# Altium PCB Chong's Cool STM32 Board.PcbDoc
Units mm, origin at the board's own origin, x right, y up, seen from the top; angles counter-clockwise.
Board outline 48 x 48 mm, 2 copper layers (Top Layer, Bottom Layer), stack 1.535 mm thick; 57 components, 45 nets, 235 pads, 166 vias.
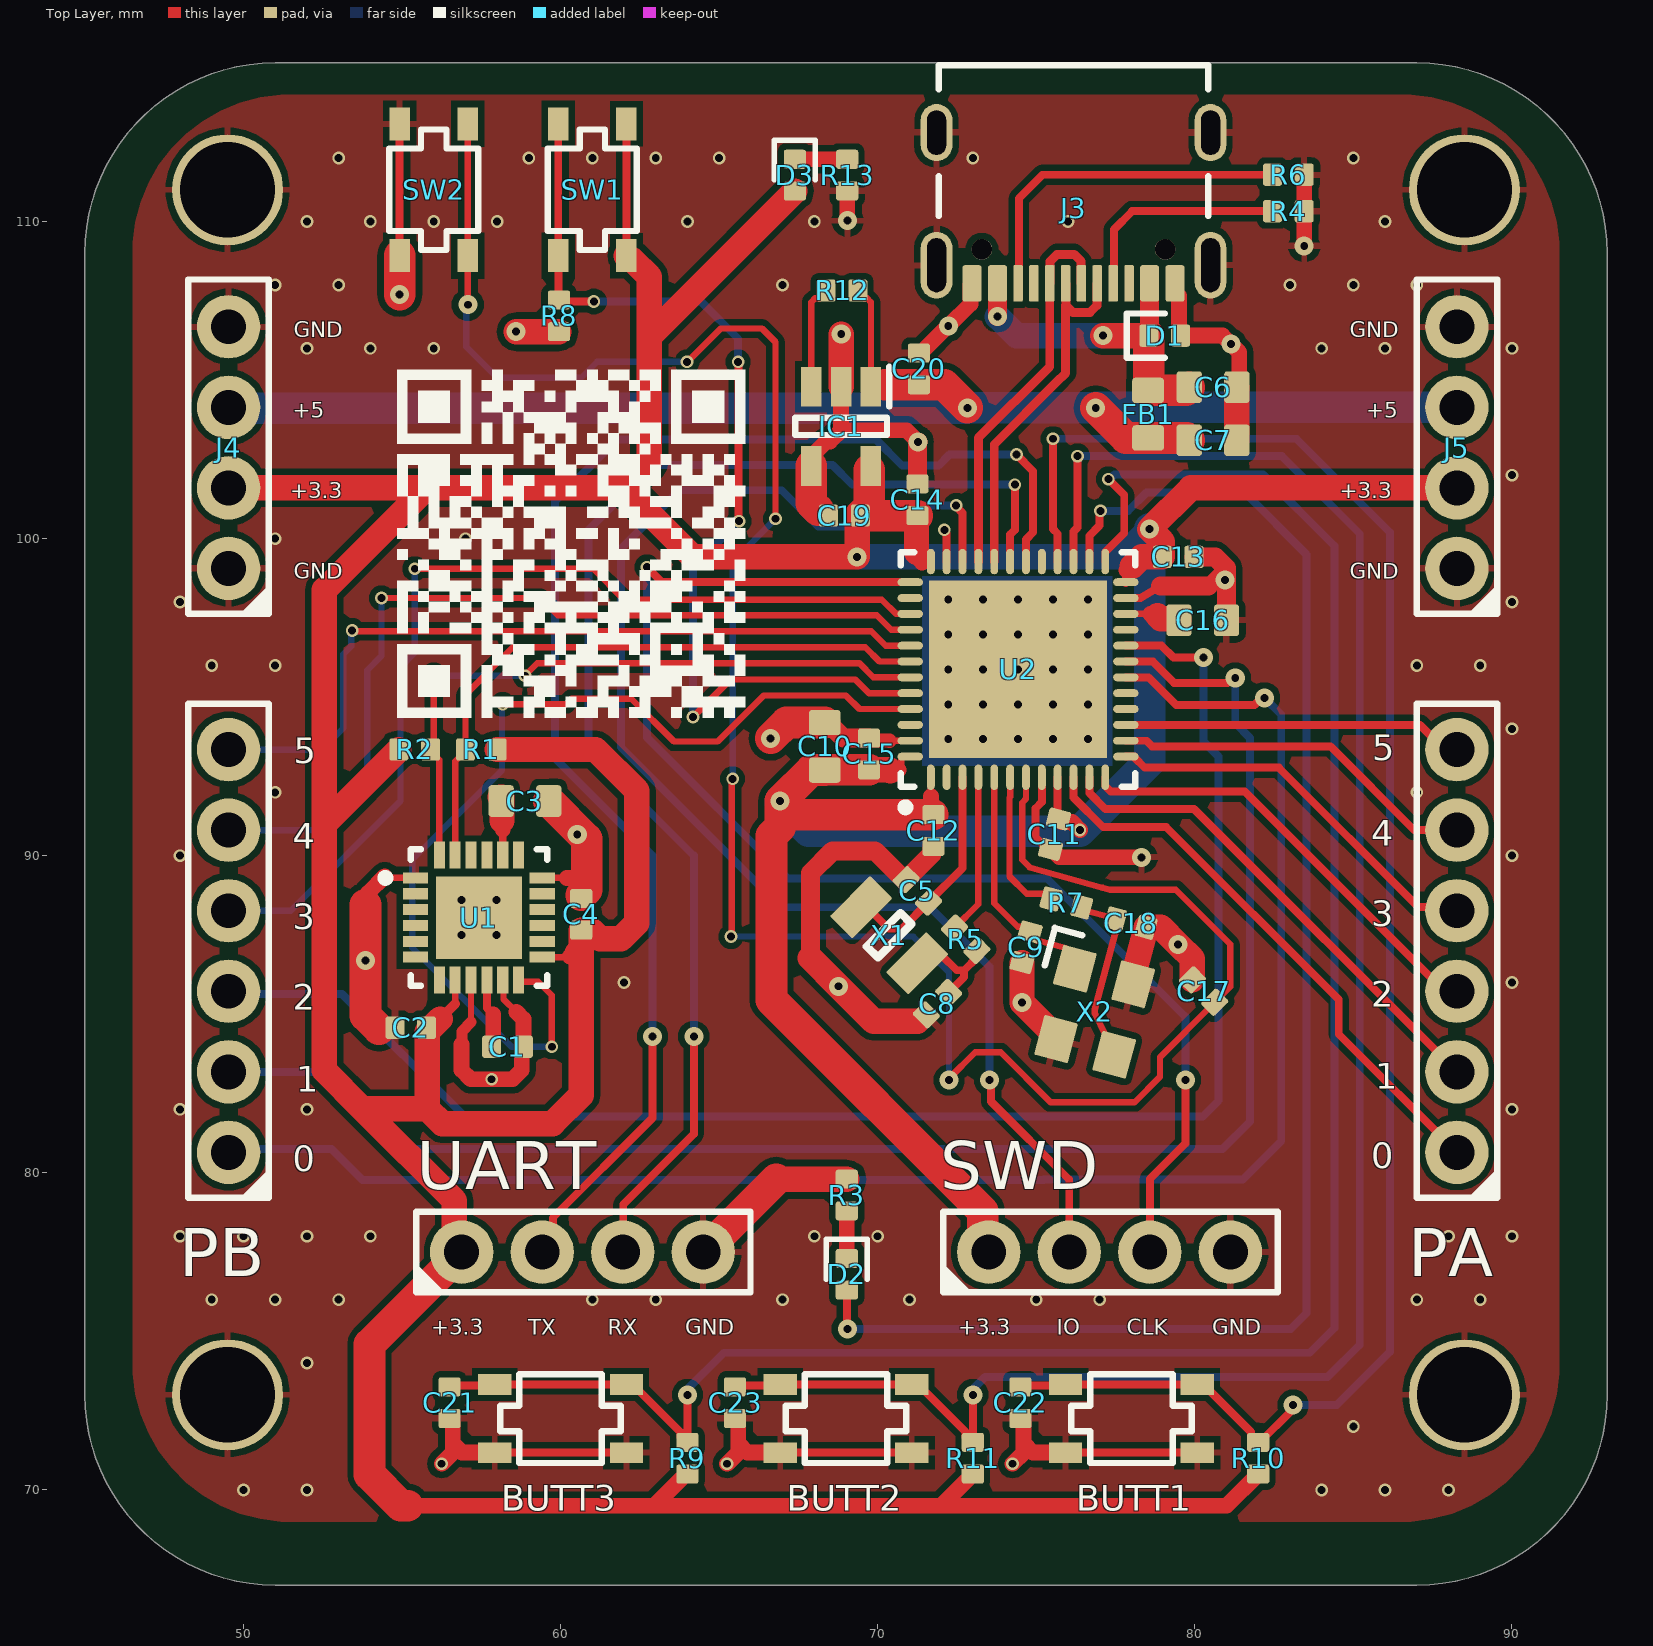
[diagram p0: Top Layer view]
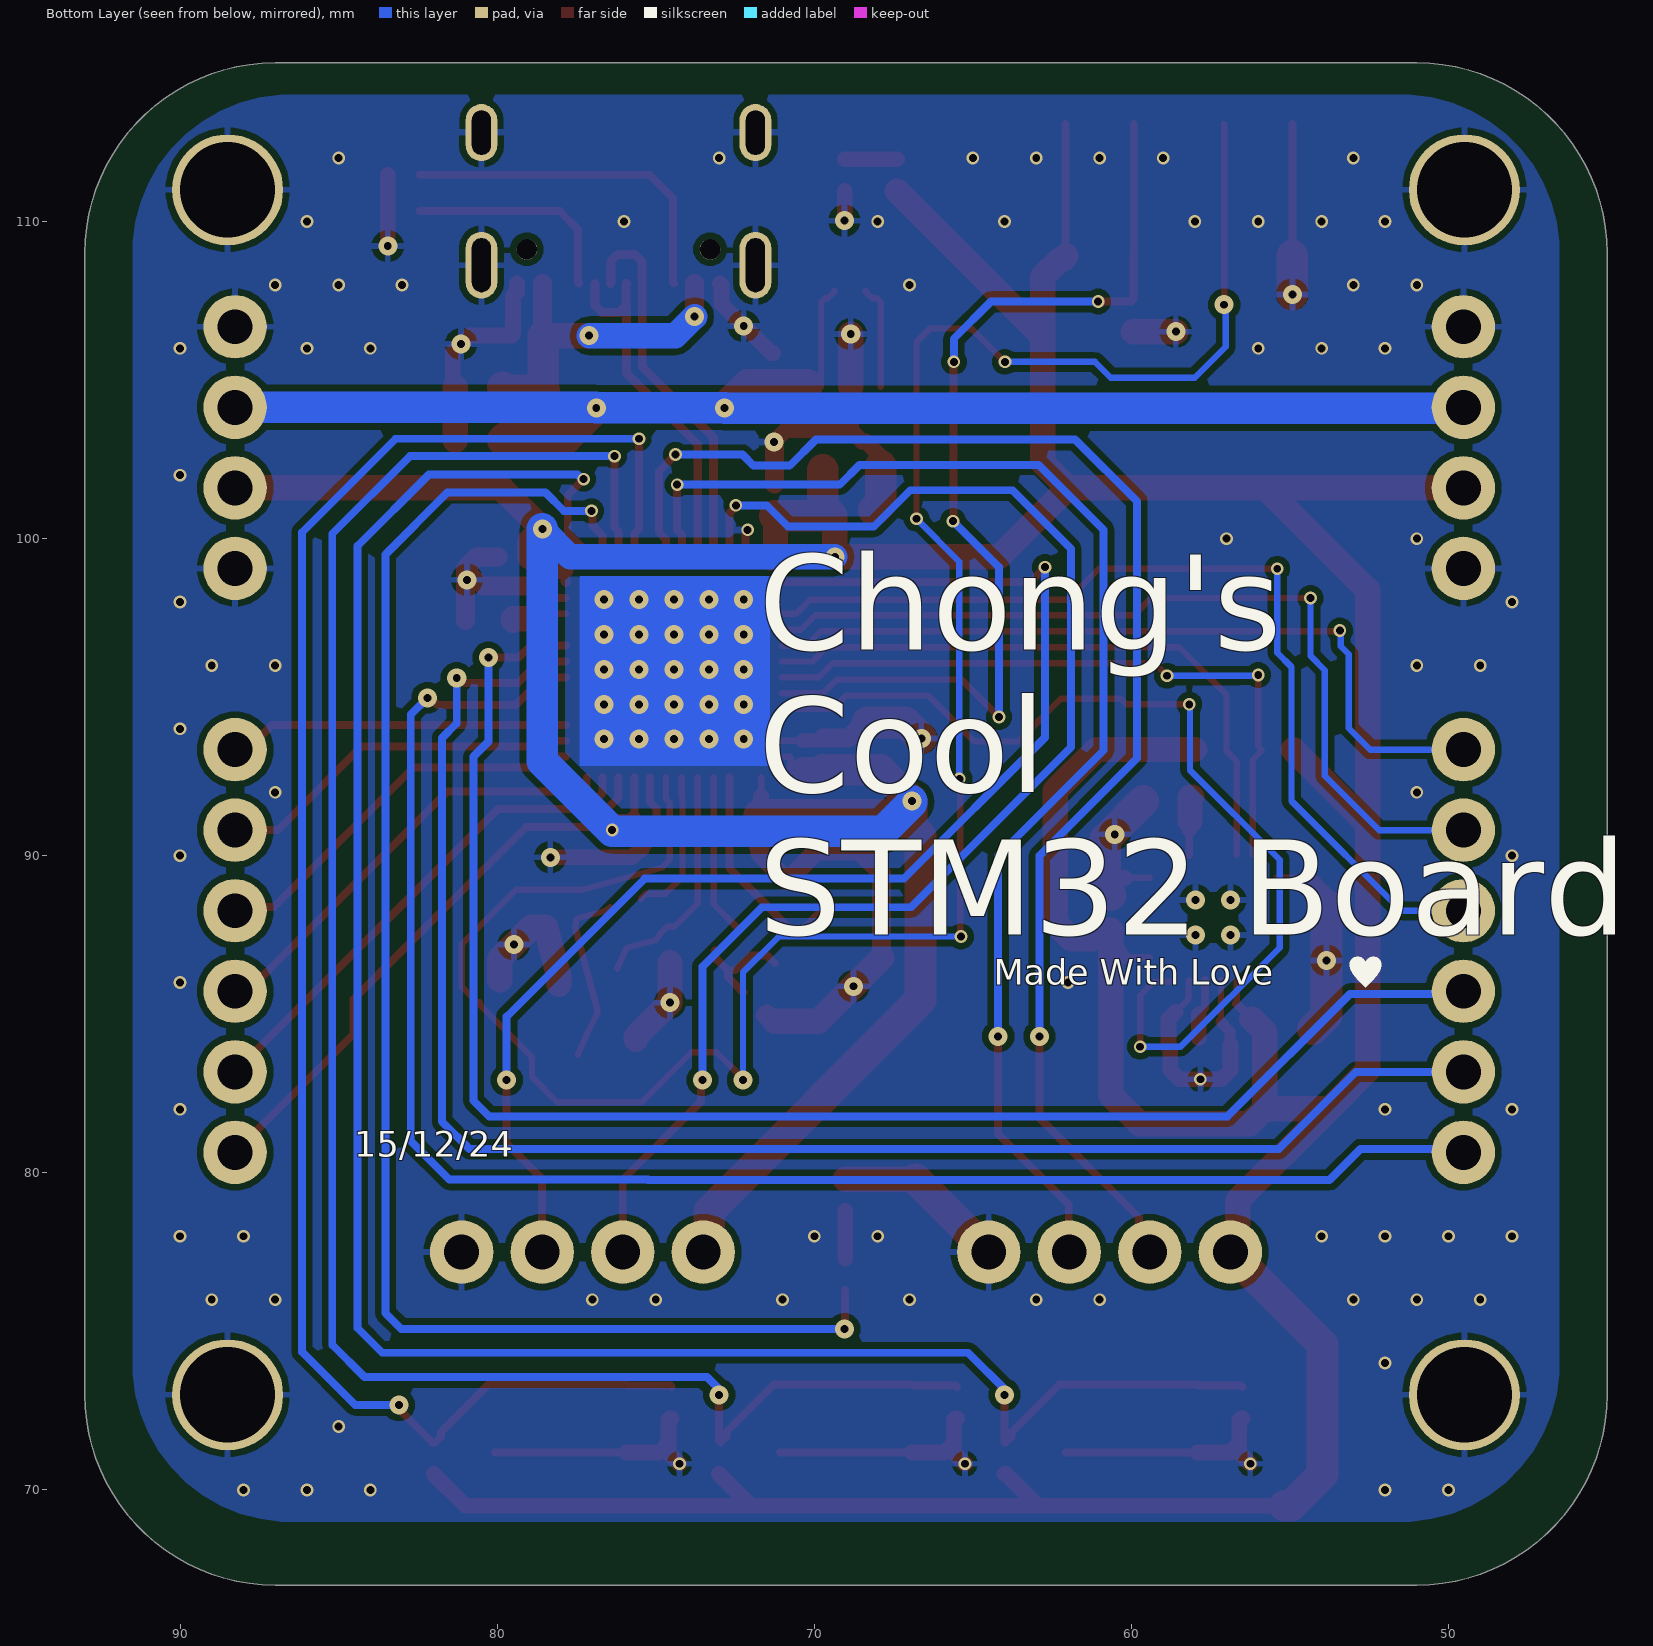
[diagram p1: Bottom Layer view, seen from below]
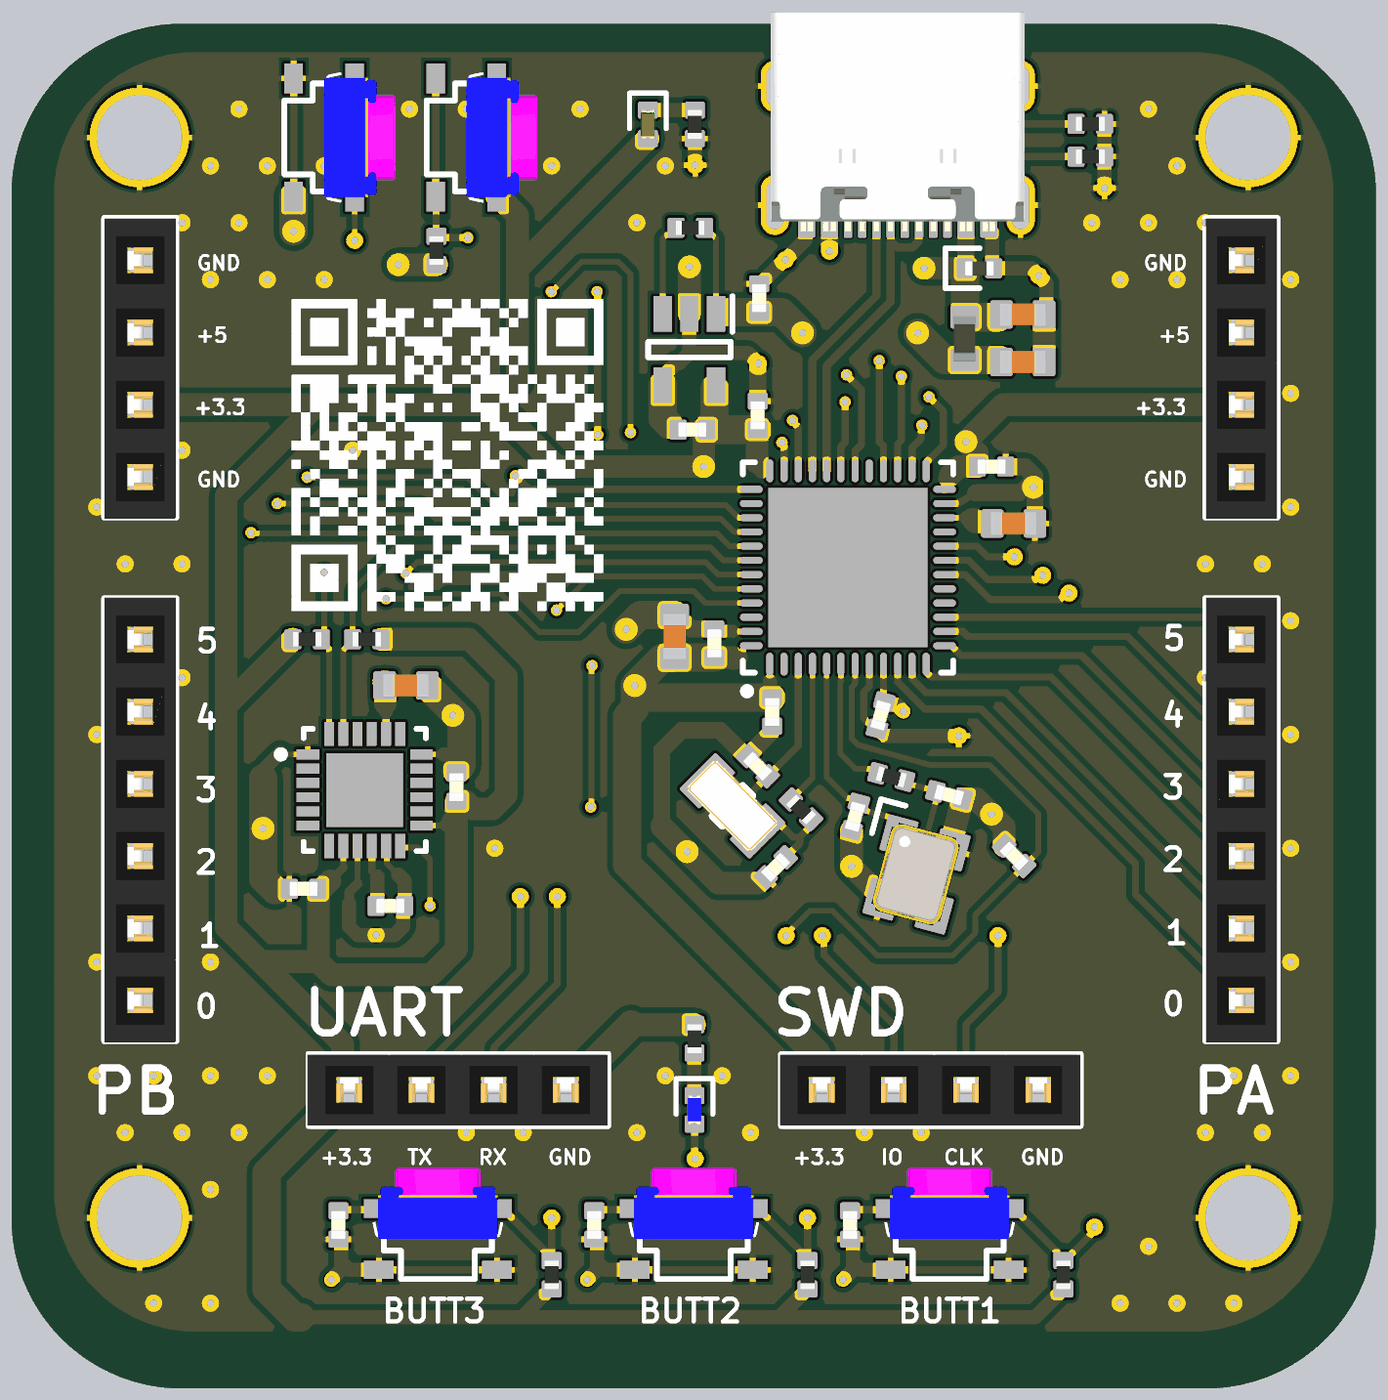
[diagram p2: 3D render of the assembled board from above, using the file's embedded part models]

## Layer stack, top to bottom
Top Solder: solder mask 0.0254, SM-001, Dk 4
Top Layer: signal copper 0.035
Dielectric 1: core 1.465, Core-043, Dk 4.6
Bottom Layer: signal copper 0.035
Bottom Solder: solder mask 0.0254, SM-001, Dk 4

## Board outline
45,73 45,109 cw(c51,109) 51,115 87,115 cw(c87,109) 93,109 93,73 cw(c87,73) 87,67 51,67 cw(c51,73)

## Design rules (kind name [scope] priority, off if disabled: settings)
Clearance [All] p1: gap=0.2 ignorepadtopadclearanceinfootprint=TRUE
DiffPairsRouting [All] p1: maxlimit=0.2 minlimit=0.2 mostfreqgap=0.2 toplayer_minwidth=0.28 toplayer_maxwidth=0.28 toplayer_prefwidth=0.28 bottomlayer_minwidth=0.28 bottomlayer_maxwidth=0.28 bottomlayer_prefwidth=0.28 impedanceprofiledriven=TRUE impedanceprofileid={8155042C-54DE-4602-B686-E9562C17702D} impedanceprofilevalue=90.000000 maxuncoupledlength=12.7
HoleSize [All] p1: absolutevalues=TRUE maxlimit=5 minlimit=0.025 maxpercent=80.000 minpercent=20.000
PolygonConnect [All] p1: connectstyle=Relief reliefconductorwidth=0.2 reliefentries=4 polygonreliefangle="90 Angle" airgapwidth=0.2
RoutingVias [All] p1: holewidth=0.25 width=0.4 viastyle="Through Hole" minholewidth=0.2 minwidth=0.35 maxholewidth=0.5 maxwidth=0.65
SolderMaskExpansion [All] p1: expansion=0.102 istentingtop=FALSE
SupplyNets "Schematic Supply Nets_3" [InNet('+3.3V')] p1: voltage=0.000
SupplyNets "Schematic Supply Nets_2" [InNet('GND')] p2: voltage=0.000
SupplyNets "Schematic Supply Nets_1" [InNet('VBUS')] p3: voltage=0.000
SupplyNets "Schematic Supply Nets" [InNet('+5')] p4: voltage=0.000
Width [All] p1: maxlimit=1 minlimit=0.2 preferedwidth=0.3 minimp=50.000000 maximp=50.000000 favimp=50.000000
28 further rules are at their usual default settings.

## Classes and differential pairs
differential pair class USB_DIFF: USB
differential pair USB: +USB_P -USB_N

## Components (designator, comment, footprint, x,y, rotation, side; value= is the part's Value field where it differs from the comment)
BUTT1 "SKRPANE010" SKRPANE010 78,72.25 r0 top (schematic designator SW4)
BUTT2 "SKRPANE010" SKRPANE010 69,72.25 r0 top (schematic designator SW5)
BUTT3 "SKRPANE010" SKRPANE010 60,72.25 r0 top (schematic designator SW3)
C1 "100n" CAP_0402 58.325,83.975 r0 top
C2 "10n" CAP_0402 55.275,84.575 r180 top
C3 "2n2" CAP_0603 58.875,91.725 r180 top
C4 "100n" CAP_0402 60.65,88.15 r90 top
C5 "1.5pF" CAP_0402 71.25,88.89 r315 top
C6 "2u2" CAP_0603 80.575,104.775 r180 top
C7 "2u2" CAP_0603 80.575,103.1 r180 top
C8 "1.5pF" CAP_0402 71.885,85.334 r45 top
C9 "10p" CAP_0402 74.679,87.112 r75 top
C10 "2u2" CAP_0603 68.329,93.45 r270 top
C11 "100n" CAP_0402 75.575,90.675 r75 top
C12 "100n" CAP_0402 71.758,90.795 r90 top
C13 "100n" CAP_0402 79.475,99.425 r180 top
C14 "100n" CAP_0402 71.25,101.225 r270 top
C15 "100n" CAP_0402 69.726,93.208 r270 top
C16 "2u2" CAP_0603 80.25,97.425 r180 top
C17 "100n" CAP_0402 80.275,85.732 r315 top
C18 "10p" CAP_0402 77.981,87.874 r165 top
C19 "1u" CAP_0402 68.95,100.725 r180 top
C20 "1u" CAP_0402 71.3,105.35 r90 top
C21 "100n" CAP_0402 56.5,72.75 r90 top
C22 "100n" CAP_0402 74.5,72.75 r90 top
C23 "100n" CAP_0402 65.5,72.75 r90 top
D1 "5V" D_0402 79.05,106.4 r180 top
D2 "BLUE" LED_0402_BLUE 69.025,76.8 r90 top
D3 "GREEN" LED_0402_GREEN 67.388,111.462 r90 top
FB1 "120R" FB_0603 78.525,103.925 r270 top
IC1 "RT9013-33PB" SOT94P279X130-5N 68.846,103.54 r270 top
J3 "USB4105-GF-A-060" USB4105-GF-A-060 76.175,110.425 r180 top
J4 "M20-7820442" "HARWIN M20-7820445" 49.53,102.87 r180 top
J5 "M20-7820442" "HARWIN M20-7820445" 88.265,102.87 r180 top
PA "M20-7820642" "HARWIN M20-7820645" 88.265,86.995 r180 top (schematic designator J1)
PB "M20-7820642" "HARWIN M20-7820645" 49.53,86.995 r180 top (schematic designator J2)
R1 "2k2" RES_0402 57.5,93.35 r0 top
R2 "2k2" RES_0402 55.4,93.35 r180 top
R3 "1k" RES_0402 69.025,79.3 r270 top
R4 "5.1k" RES_0402 82.95,110.325 r0 top
R5 "0R" RES_0402 72.774,87.366 r315 top
R6 "5.1k" RES_0402 82.95,111.475 r0 top
R7 "0R" RES_0402 75.949,88.509 r345 top
R8 "10k" RES_0402 59.95,107.025 r90 top
R9 "1k" RES_0402 64,71 r270 top
R10 "1k" RES_0402 82,71 r270 top
R11 "1k" RES_0402 73,71 r270 top
R12 "10k" RES_0402 68.875,107.825 r0 top
R13 "1k" RES_0402 69.037,111.462 r90 top
SW1 "SKRPANE010" SKRPANE010 61,111 r270 top
SW2 "SKRPANE010" SKRPANE010 56,111 r270 top
SWD "M20-7820442" "HARWIN M20-7820445" 77.31,77.5 r90 top (schematic designator J7)
U1 "MPU-6050" IS-QFN-24_V 57.425,88.05 r0 top
U2 "STM32F411CEU6" STM-UFQFPN48_L 74.425,95.875 r90 top
UART "M20-7820442" "HARWIN M20-7820445" 60.69,77.5 r90 top (schematic designator J6)
X1 "32.768kHz" XTAL_3215-2 70.361,87.493 r135 top
X2 "24MHz" XTAL_3225 76.838,85.08 r255 top

## Footprints (in the part's own frame and the unit in brackets; to place one, negate y for a bottom-side part, rotate by r counter-clockwise, add the part's x,y. Pads: shape width x height; smd on the part's side, far side on the other; paste and mask are expansions set on the pad)
CAP_0402 [mm]
  rrect25% 0.6x0.7 smd: 1(-0.5,0) 2(0.5,0)
  body extent -0.5,-0.26 0.5,0.27, height 0.37
CAP_0603 [mm]
  rrect25% 0.8x1 smd: 1(-0.75,0) 2(0.75,0)
  body extent -0.8,-0.4 0.8,0.4, height 0.51
D_0402 [mm]
  rrect25% 0.6x0.7 smd: A(-0.5,0) K(0.5,0)
  silkscreen extent 0,-0.7 1.2,0.7, body extent -0.5,-0.25 0.5,0.25, height 0.51
FB_0603 [mm]
  rrect25% 0.8x1 smd: 1(-0.75,0) 2(0.75,0)
  body extent -0.8,-0.4 0.8,0.4, height 0.81
"HARWIN M20-7820445" [mm] "2.54mm DIL PC TAIL PIN HEADER ASSEMBLY"
  round 2 hole 1.1: 1(0,3.81) 2(0,1.27) 3(0,-1.27) 4(0,-3.81)
  silkscreen extent -1.27,-5.3 1.27,5.27, body extent -1.25,-5.28 1.25,5.28, height 8.5
"HARWIN M20-7820645" [mm] "2.54mm DIL PC TAIL PIN HEADER ASSEMBLY"
  round 2 hole 1.1: 1(0,6.35) 2(0,3.81) 3(0,1.27) 4(0,-1.27) 5(0,-3.81) 6(0,-6.35)
  silkscreen extent -1.27,-7.8 1.27,7.81, body extent -1.25,-7.82 1.25,7.82, height 8.5
IS-QFN-24_V [mm] "QFN, 24-Leads, Body 4x4mm, Pitch 0.5mm, Thermal Pad 2.7x2.6mm"
  rect 0.8x0.35 smd: 1(-2,1.25) 2(-2,0.75) 3(-2,0.25) 4(-2,-0.25) 5(-2,-0.75) 6(-2,-1.25) 13(2,-1.25) 14(2,-0.75) 15(2,-0.25) 16(2,0.25) 17(2,0.75) 18(2,1.25)
  rect 0.35x0.85 smd mask+0.102: 7(-1.25,-1.975) 8(-0.75,-1.975) 9(-0.25,-1.975) 10(0.25,-1.975) 11(0.75,-1.975) 12(1.25,-1.975) 19(1.25,1.975) 20(0.75,1.975) 21(0.25,1.975) 22(-0.25,1.975) 23(-0.75,1.975) 24(-1.25,1.975)
  rect 2.7x2.6 smd: 25(0,0)
  silkscreen extent -3.07,-2.15 2.15,2.15, body extent -2,-2 2,2, height 0.95
LED_0402_BLUE [mm]
  rrect25% 0.6x0.7 smd: A(-0.5,0) K(0.5,0)
  silkscreen extent -0.15,-0.65 1.1,0.65, body extent -0.51,-0.25 0.51,0.25, height 0.45
LED_0402_GREEN [mm]
  rrect25% 0.6x0.7 smd: A(-0.5,0) K(0.5,0)
  silkscreen extent -0.15,-0.65 1.1,0.65, body extent -0.51,-0.25 0.51,0.25, height 0.45
RES_0402 [mm]
  rrect25% 0.6x0.7 smd: 1(-0.5,0) 2(0.5,0)
  body extent -0.5,-0.25 0.5,0.25, height 0.3
SKRPANE010 [mm]
  rect 1.05x0.65 smd: 12(-2.075,1.075) 12(2.075,1.075) 34(-2.075,-1.075) 34(2.075,-1.075)
  silkscreen extent -1.9,-1.4 1.9,1.4, body extent -2.3,-1.6 2.3,1.6, height 2.51
SOT94P279X130-5N [mm]
  rect 1.25x0.65 smd: 1(-1.25,0.94) 2(-1.25,0) 3(-1.25,-0.94) 4(1.25,-0.94) 5(1.25,0.94)
  silkscreen extent -1.88,-1.45 0.28,1.51, body extent 0,0 0,0
STM-UFQFPN48_L [mm] "QFN, 48-Leads, Body 7.1x7.1mm, Pitch 0.5mm, Thermal Pad 5.6x5.6mm, IPC High Density"
  oval 0.8x0.25 smd: 1(-3.4,2.75) 2(-3.4,2.25) 3(-3.4,1.75) 4(-3.4,1.25) 5(-3.4,0.75) 6(-3.4,0.25) 7(-3.4,-0.25) 8(-3.4,-0.75) 9(-3.4,-1.25) 10(-3.4,-1.75) 11(-3.4,-2.25) 12(-3.4,-2.75) 25(3.4,-2.75) 26(3.4,-2.25) 27(3.4,-1.75) 28(3.4,-1.25) 29(3.4,-0.75) 30(3.4,-0.25) 31(3.4,0.25) 32(3.4,0.75) 33(3.4,1.25) 34(3.4,1.75) 35(3.4,2.25) 36(3.4,2.75)
  oval 0.25x0.8 smd: 13(-2.75,-3.4) 14(-2.25,-3.4) 15(-1.75,-3.4) 16(-1.25,-3.4) 17(-0.75,-3.4) 18(-0.25,-3.4) 19(0.25,-3.4) 20(0.75,-3.4) 21(1.25,-3.4) 22(1.75,-3.4) 23(2.25,-3.4) 24(2.75,-3.4) 37(2.75,3.4) 38(2.25,3.4) 39(1.75,3.4) 40(1.25,3.4) 41(0.75,3.4) 42(0.25,3.4) 43(-0.25,3.4) 44(-0.75,3.4) 45(-1.25,3.4) 46(-1.75,3.4) 47(-2.25,3.4) 48(-2.75,3.4)
  rect 5.6x5.6 smd: 49(0,0)
  silkscreen extent -4.47,-3.7 3.7,3.7, body extent -3.55,-3.55 3.55,3.55, height 0.6
USB4105-GF-A-060 [mm]
  rrect25% 0.6x1.15 smd mask+0.05: A1B12(-3.2,2.378) A4B9(-2.4,2.378) B1A12(3.2,2.378) B4A9(2.4,2.378)
  rrect25% 0.3x1.15 smd mask+0.05: A5(-1.25,2.378) A6(-0.25,2.378) A7(0.25,2.378) A8(1.25,2.378) B5(1.75,2.378) B6(0.75,2.378) B7(-0.75,2.378) B8(-1.75,2.378)
  round 0.65 hole 0.65 unplated mask+0.05: MH(-2.89,1.303) MH(2.89,1.303)
  oval 1x1.8 hole 0.6 slot 1.4 at 90 deg: SH(-4.32,-2.377) SH(4.32,-2.377)
  oval 1x2.1 hole 0.6 slot 1.7 at 90 deg: SH(-4.32,1.803) SH(4.32,1.803)
  silkscreen extent -4.25,-4.5 4.25,0.25, body extent -4.47,-4.97 4.47,2.73, height 3.27
XTAL_3215-2 [mm]
  rrect10% 1x1.8 smd: 1(-1.25,0) 2(1.25,0)
  silkscreen extent -0.25,-0.75 0.25,0.75, body extent -1.6,-0.75 1.6,0.75, height 0.91
XTAL_3225 [mm]
  rrect10% 1.3x1.1 smd: 1(-1.15,-0.95) 2(1.15,-0.95) 3(1.15,0.95) 4(-1.15,0.95)
  silkscreen extent -2.23,-1.89 -1,-1, body extent -1.6,-1.28 1.6,1.22, height 0.61

## Part data
BUTT1 BUTT2 BUTT3 SW1 SW2: "Tactile Switch SMD SPST", Manufacturer="Alps Alpine", Manufacturer Part Number=SKRPANE010
C1 C2 C4 C5 C8 C9 C11 C12 C13 C14 C15 C17 C18 C19 C20 C21 C22 C23: library part CAP_0402, "Capacitor SMD 0402"
C3 C6 C7 C10 C16: library part CAP_0603, "Capacitor SMD 0603"
D1: library part D_TVS_0402, "Diode TVS / ESD 0402"
D2: library part LED_0402_BLUE, "LED 0402 BLUE SMD"
D3: library part LED_0402_GREEN, "LED 0402 GREEN SMD"
FB1: library part FB_0603, "Ferrite Bead SMD 0603"
IC1: library part RT9013-12PB, "Integrated Circuit, Get 33PB rather than 12PB", Manufacturer_Name=RICHTEK, Datasheet Link=https://www.digchip.com/datasheets/parts/datasheet/403/RT9013-12PB-pdf.php, Height=1.295mm, Manufacturer_Part_Number=RT9013-12PB
J3: "USB Connector Type C SMT 12 Pin", Manufacturer=GCT, Distributor Link=https://eu.mouser.com/ProductDetail/GCT/USB4105-GF-A-060?qs=QNEnbhJQKvY2mocwNJzgfA%3D%3D, Manufacturer Part Number=USB4105-GF-A-060
J4 J5 SWD UART: "CONN RCPT 4POS 0.1 GOLD PCB", Current Rating (Amps)=3A, Insulation Color=Black, Manufacturer="Harwin Inc.", Material Flammability Rating="UL94 V-0", Operating Temperature="-40°C ~ 105°C", Supplier Part Number 1=952-1791-ND, ComponentLink1Description=Datasheet, ComponentLink1URL=https://cdn.harwin.com/pdfs/Harwin_PC_Connectors_M20.pdf, ComponentLink2Description="DigiKey Link", ComponentLink2URL=https://www.digikey.com/en/products/detail/harwin-inc/M20-7820442/3727760, Connector Type=Receptacle, Contact Finish - Mating=Gold, Contact Finish - Post=Tin, Contact Finish Thickness - Mating=Flash, Contact Length - Post="0.118\" (3.00mm)", Contact Type="Female Socket", Fastening Type=Push-Pull, Insulation Height="0.335\" (8.51mm)", LastUpdated="21-Sep-22 6:57:11 PM", Lifecycle Status=Active, Mated Stacking Heights="11.04mm, 12.63mm", Minimum Order=1, Mounting Type="Through Hole", Number of Positions=4, Number of Positions Loaded=All, Number of Rows=1, Packaging=Tube, Part Number=M20-7820442, Part Status=Active, Pitch - Mating="0.100\" (2.54mm)", Price=0.45, Series=M20, Style="Board to Board or Cable", Supplier 1=DigiKey, Termination=Solder
PA PB: "CONN RCPT 6POS 0.1 GOLD PCB", Current Rating (Amps)=3A, Insulation Color=Black, Manufacturer="Harwin Inc.", Material Flammability Rating="UL94 V-0", Operating Temperature="-40°C ~ 105°C", Supplier Part Number 1=952-1808-ND, ComponentLink1Description=Datasheet, ComponentLink1URL=https://cdn.harwin.com/pdfs/C001XX_M20_Series_Connectors.pdf, ComponentLink2Description="DigiKey Link", ComponentLink2URL=https://www.digikey.com/en/products/detail/harwin-inc/M20-7820642/3727776, Connector Type=Receptacle, Contact Finish - Mating=Gold, Contact Finish - Post=Tin, Contact Finish Thickness - Mating=Flash, Contact Length - Post="0.118\" (3.00mm)", Contact Type="Female Socket", Fastening Type=Push-Pull, Insulation Height="0.335\" (8.51mm)", LastUpdated="21-Sep-22 6:58:09 PM", Lifecycle Status=Active, Mated Stacking Heights="11.04mm, 12.63mm", Minimum Order=1, Mounting Type="Through Hole", Number of Positions=6, Number of Positions Loaded=All, Number of Rows=1, Packaging=Tube, Part Number=M20-7820642, Part Status=Active, Pitch - Mating="0.100\" (2.54mm)", Price=0.55, Series=M20, Style="Board to Board or Cable", Supplier 1=DigiKey, Termination=Solder
R1 R2 R3 R4 R5 R6 R7 R8 R9 R10 R11 R12 R13: library part RES_0402, "Resistor SMD 0402"
U1: library part CMP-1753-00002-2, "3-Axis Gyroscope, Accelerometer and a Digital Motion Processor(TM) (DMP), 2.375 to 3.46 V, -40 to 85 degC, 24-Pin QFN, RoHS, Tape and Reel", Manufacturer=InvenSense, Standard Package=5,000, Category=Sensors,Transducers, Datasheet URL=http://datasheet.octopart.com/MPU-6050-InvenSense-datasheet-14421344.pdf, Datasheet Version="Rev. 3.3, 05/2012", Dynamic Catalog=MPU-6000™Series, Family=Multifunction, Featured Product=MPU-60506-Axis,IntegratedI²CSolution, Manufacturer URL=http://www.invensense.com/, Online Catalog=MPU-6000™Series, Other Names="1428-1007-2 / MPU6050", Output Type=Digital, Sensor Type=MotionTracking, Unit PriceUSD=Digital
U2: library part CMP-0243-00165-1, "ARM Cortex-M4 32-bit MCU+FPU, 512 KB Flash, 128 KB RAM, 36 I/Os, 48-Pin UFQFPN, -40 to 85 degC, Tray", I/Os (High Current)=36, Operating Frequency(F) (Processor speed) (MHz)=100, Package Description=UFQFPN48, Package Reference="48-Pin Ultra Thin Fine Pitch Quad Flat No-Lead, 7 x 7 x 0.6 mm Body, 0.5 mm Pitch, Exposed Pad", Supply Voltage(Vcc) min (V)=1.7, ComponentLink1Description="Manufacturer URL", ComponentLink1URL=http://www.st.com/, ComponentLink2Description=Datasheet, ComponentLink2URL=http://www.st.com/st-web-ui/static/active/en/resource/technical/document/datasheet/DM00115249.pdf, Core="ARM Cortex-M4", DatasheetVersion="Rev. 6", FLASH Size (Prog) (kB)=512, Internal RAM Size (kB)=128, Mounting Technology="Surface Mount", Packing=Tray
X1: library part XTAL_3215, "Crystal SMD 3215"
X2: library part TSX-3225_24.0000MF15X-AC, "Crystal SMD 24MHz 10PPM 7pF 3225", Manufacturer=Epson, Manufacturer Part Number="TSX-3225 24.0000MF15X-AC"

## Free pads (board coordinates)
  round 3.5 hole 3: PTH0(49.5,111) PTH1(88.5,111) PTH3(49.5,73) PTH4(88.5,73)

## Via types
v1: diameter 0.4, hole 0.25, Top Layer to Bottom Layer, 101 vias
v2: diameter 0.6, hole 0.25, Top Layer to Bottom Layer, 65 vias

## Nets (pads, with @x,y where several pads share a name; then routed paths per layer and width w, separated by ;. In a path a pad name is that pad's centre, name@x,y a point inside that pad or via, vN(x,y) a via of type N, cw(c..) or ccw(c..) an arc to the next point about the centre after c; other vN are vias at no path point)
+3.3V: C2.1 C4.1 C10.2 C11.2 C12.2 C13.2 C14.2 C15.2 C19.1 D3.A IC1.5 J4.2 J5.2 R1.2 R2.2 R9.2 R10.2 R11.2 SW1.12 SWD.1 U1.8 U1.13 U2.1 U2.9 U2.24 U2.36 U2.48 UART.1 | length 219.2
  Top Layer w0.2: 56.675,85.325 U1.8 ; U1.13 60.275,86.8 60.3,86.825 ; 70.65,92.7 70.74,92.79 70.74,93.102 70.764,93.125 U2.48 ; 71.4,99.25 71.652,99.25 71.675,99.273 U2.36 ; 71.675,91.875 U2.1
  Top Layer w0.25: SW1.12@62.075,108.925 SW1.12@62.075,113.075 ; U2.9 75.675,91.187 C11.2
  Top Layer w0.3: 56.2,84.85 56.675,85.325 ; U2.24 77.85,98.65 77.85,99
  Top Layer w0.5: 55.175,69.5 62.95,69.5 ; 60.3,86.825 60.425,86.825 60.525,86.925 ; R9.2 63.95,70.5 62.95,69.5 ; v2(66.925,91.725) v2@66.952,91.725 ; 70.4,92.675 70.625,92.675 70.65,92.7 ; 71.225,99.575 71.225,99.425 71.4,99.25 ; 71.675,91.875 71.675,91.345 71.725,91.295 C12.2 ; R11.2 72,69.5 ; C11.2 75.804,91.058 76.129,91.058 v1(76.375,90.813) ; 77.85,99 77.975,99.125 78.025,99.125 ; R10.2 81,69.5 72,69.5 ; 62.95,69.5 72,69.5
  Top Layer w0.8: J4.2 55.765,101.6 ; R2.2 52.55,91 ; 56.2,84.85 55.8,84.45 55.8,82.019 ; UART.1 56.65,77.73 56.65,79.125 53.756,82.019 ; R1.2 61.1,93.35 62.4,92.05 62.4,87.875 61.906,87.381 61.244,87.381 60.975,87.65 C4.1 60.65,87.05 ; 60.525,86.925 60.65,87.05 ; SW1.12@62.075,108.925 62.15,108.85 62.15,108.8 62.256,108.8 62.8,108.256 62.8,106.375 ; D3.A 62.8,106.375 ; C19.1 69.35,100.625 v2(69.35,99.425) 64.175,99.425 62,101.6 ; C15.2 70.367,92.708 70.4,92.675 ; 71.225,99.575 C14.2@71.225,100.7 ; 78.025,99.125 78.325,99.425 C13.2 78.975,99.9 v2(78.575,100.3) 79.875,101.6 J5.2 ; 52.55,91 52.55,83.225 53.756,82.019 ; 52.55,91 52.55,98.385 55.765,101.6 ; 53.756,82.019 55.8,82.019 ; 55.765,101.6 62,101.6 ; 55.8,82.019 56.269,81.55 59.75,81.55 60.65,82.45 60.65,87.05 ; 62,101.6 62.8,102.4 62.8,106.375
  Top Layer w1: 55.175,69.5 54.961,69.5 53.975,70.486 53.975,74.595 UART.1 ; v2@66.952,91.725 67.382,91.295 C12.2@71.725,91.295 ; C10.2 67.9,92.7 v2(66.925,91.725) 66.925,90.9 66.65,90.625 66.65,85.45 73.309,78.791 73.309,77.691 SWD.1 ; C10.2@68.337,92.708 C15.2 ; IC1.5@69.736,102.165 69.736,101.011 C19.1 C14.2
  Bottom Layer w0.8: v2(69.35,99.425) 77.7,99.425 v2(78.575,100.3)
  Bottom Layer w1: v2(66.925,91.725) 66.925,91.675 67.825,90.775 76.337,90.775 v1(76.375,90.813) ; v1@76.375,90.775 78.575,92.975 v2(78.575,100.3)
+5: C7.2 C20.1 FB1.2 IC1.1 J4.3 J5.3 R12.2 | length 48.3
  Top Layer w0.2: R12.2 69.375,107.775 69.575,107.575 69.669,107.575 69.786,107.458 IC1.1
  Top Layer w1: 70.225,104.85 72.1,104.85 v2(72.825,104.125) ; v2(76.875,104.125) 77.825,103.175 79.75,103.175 C7.2
  Bottom Layer w1: J4.3 49.558,104.112 72.812,104.112 v2(72.825,104.125) v2(76.875,104.125) 76.89,104.14 J5.3
CXTAL_IN: C8.2 R5.2 X1.1 | length 3.5
  Top Layer w0.25: X1.1 71.492,86.857 72.023,86.857 72.492,86.387 72.727,86.387 ; C8.2 72.727,86.176 72.727,86.387 ; R5.2 73.128,86.788 72.727,86.387
GND: BUTT1.34 BUTT2.34 BUTT3.34 C1.2 C2.2 C3.1 C4.2 C5.1 C6.1 C7.1 C8.1 C9.1 C10.1 C11.1 C12.1 C13.1 C14.1 C15.1 C16.1 C17.1 C18.1 C19.2 C20.2 C21.1 C22.1 C23.1 D1.A IC1.2 IC1.4 J3.A1B12 J3.B1A12 J3.SH J4.1 J4.4 J5.1 J5.4 pad.PTH0 pad.PTH1 pad.PTH3 pad.PTH4 R3.1 R4.2 R6.2 R8.1 R13.1 SW2.34 SWD.4 U1.1 U1.9 U1.11 U1.18 U1.25 U2.8 U2.23 U2.35 U2.47 U2.49 UART.4 X2.2 X2.4 | length 112.6
  Top Layer w0.2: 54.5,89.35 54.55,89.3 U1.1 ; 57.175,84.75 U1.9 ; U1.11 58.2,86.05 58.2,85.475 58.6,85.075 ; U1.18 60.2,89.3 ; 70.375,93.625 U2.47
  Top Layer w0.25: SW2.34@54.925,108.925 SW2.34@54.925,113.075 ; BUTT3.34@57.925,71.175 BUTT3.34@62.075,71.175 ; BUTT2.34@66.925,71.175 BUTT2.34@71.075,71.175 ; v1(72.1,100.275) 72.1,100.234 72.175,100.159 U2.35 ; U2.8 75.175,91.69 74.981,91.496 74.981,90.577 75.366,90.192 C11.1 ; BUTT1.34@75.925,71.175 BUTT1.34@80.075,71.175 ; U2.23 78.287,98.125 78.917,98.5
  Top Layer w0.35: 56.875,84.05 56.885,84.06 56.885,84.46 57.175,84.75
  Top Layer w0.45: C15.1 69.801,93.633 70.367,93.633 70.375,93.625
  Top Layer w0.5: 53.927,88.825 54.452,89.35 ; v1(56.25,70.825) 56.6,71.175 56.6,71.468 ; C21.1 56.55,72.25 56.6,72.2 56.6,71.468 ; 56.875,84.05 56.875,83.243 57.168,82.95 58.482,82.95 58.775,83.243 58.775,83.925 C1.2 58.825,84.85 58.6,85.075 ; BUTT3.34@57.925,71.175 56.893,71.175 56.6,71.468 ; 60.2,89.3 60.357,89.3 ; v1(65.25,70.825) 65.6,71.175 65.6,71.468 ; C23.1 65.55,72.25 65.6,72.2 65.6,71.468 ; BUTT2.34@66.925,71.175 65.893,71.175 65.6,71.468 ; IC1.4 67.906,102.59 68.377,103.061 68.492,103.061 68.846,103.415 ; IC1.2 68.846,103.415 ; R13.1 69.037,110.037 v2(69.05,110.025) ; v2@71.256,103.069 70.91,103.415 68.846,103.415 ; C20.2 71.35,105.85 72.2,106.7 v2(72.225,106.7) ; v2@72.244,106.719 72.925,107.4 72.925,107.998 J3.B1A12 ; v1(74.25,70.825) 74.6,71.175 74.6,71.468 ; C22.1 74.55,72.25 74.6,72.2 74.6,71.468 ; C11.1 75.495,90.192 75.737,89.95 v2(78.325,89.95) ; BUTT1.34@75.925,71.175 74.893,71.175 74.6,71.468 ; J3.A1B12 79.375,107.773 79.5,107.648 79.5,106.45 D1.A 80.875,106.4 81.4,105.875 81.4,104.85 C6.1 ; 80.432,98.5 81,99.068 ; v2(83.45,109.225) R6.2
  Top Layer w0.6: 67.875,86.775 67.875,89.45 68.575,90.15 69.919,90.15 70.861,89.208 71.708,90.055 71.708,90.295 C12.1 ; C10.1 68.429,94.2 68.921,93.708 C15.1 ; C14.1 71.25,103.025 v2(71.275,103.05) ; 71.255,84.775 71.496,85.016 C8.1 ; 78.917,98.5 80.432,98.5 ; C13.1 79.975,99.42 80.649,99.42 81,99.068 C16.1
  Top Layer w0.8: v2(58.6,106.525) R8.1 ; 66.8,79.8 R3.1 ; 67.875,86.775 v2(68.767,85.883) 69.875,84.775 71.255,84.775 ; IC1.2 68.846,106.446 v2(68.85,106.45) ; C9.1 v2(74.55,85.366) 75.623,84.292 X2.2 ; X2.4 78.051,86.204 C18.1 78.93,87.745 v2(79.475,87.2) 79.921,86.754 C17.1 ; C7.1 C6.1
  Top Layer w1: 53.85,88.45 53.85,84.95 54.275,84.525 ; v2(54.925,107.7) SW2.34@54.925,108.925 ; C3.1 60.825,90.525 60.825,88.925 C4.2@60.65,88.75 ; UART.4 66.8,79.8 ; v2(66.625,93.7) 67.125,94.2 C10.1 ; IC1.4 67.906,101.119 68.125,100.9
  other v1: 50,70 52,70 84,70 86,70 88,70 85,72 52,74 49,76 51,76 53,76 61,76 63,76 67,76 71,76 75,76 77,76 87,76 89,76 48,78 50,78 52,78 54,78 68,78 70,78 88,78 90,78 48,82 52,82 90,82 57.825,82.95 62,86 90,86 48,90 90,90 51,92 87,92 90,94 49,96 51,96 87,96 89,96 48,98 90,98 51,100 57,100 90,102 52,106 54,106 56,106 84,106 86,106 90,106 51,108 53,108 67,108 83,108 85,108 87,108 52,110 54,110 56,110 58,110 64,110 68,110 76,110 86,110 53,112 59,112 61,112 63,112 65,112 73,112 85,112
  other v2: 53.85,86.7 56.875,87.5 57.975,87.5 56.875,88.6 57.975,88.6 60.525,90.675 72.225,93.675 73.325,93.675 74.425,93.675 75.525,93.675 76.625,93.675 72.225,94.775 73.325,94.775 74.425,94.775 75.525,94.775 76.625,94.775 72.225,95.875 73.325,95.875 74.425,95.875 75.525,95.875 76.625,95.875 72.225,96.975 73.325,96.975 74.425,96.975 75.525,96.975 76.625,96.975 72.225,98.075 73.325,98.075 74.425,98.075 75.525,98.075 76.625,98.075 80.95,98.7 81.138,106.138
HXTAL_IN: C18.2 R7.2 X2.3 | length 5.7
  Top Layer w0.2: R7.2 76.607,88.258 77.309,88.07 C18.2 77.537,87.734 76.844,85.145 ccw(c77.037,85.094) 76.857,85.006 77.166,84.371 X2.3
IMU_CPOUT: C3.2 U1.20 | length 1.9
  Top Layer w0.25: U1.20 58.175,90.825
  Top Layer w0.5: 58.15,91.1 58.175,91.075 58.175,90.825
  Top Layer w0.8: C3.2@58.1,91.85 58.15,91.85 58.15,91.1
IMU_INT: U1.12 U2.45 | length 31.7
  Top Layer w0.2: v1(58.175,94.775) 60.167,94.775 60.342,94.95 62.225,94.95 63.575,93.6 64.95,93.6 66.4,95.05 69,95.05 69.425,94.625 U2.45 ; U1.12 58.725,86.025 59.3,86.025 59.725,85.6 v1(59.725,83.975)
  Bottom Layer w0.2: v1(58.175,94.775) 58.15,94.75 58.15,92.7 55.325,89.875 55.325,87.1 58.45,83.975 v1(59.725,83.975)
IMU_REGOUT: C1.1 U1.10 | length 1.9
  Top Layer w0.25: U1.10 57.675,85.2 57.875,85
  Top Layer w0.5: C1.1@57.875,84.25 57.875,84.964 57.875,85
IMU_SCL: R1.1 U1.23 U2.42 | length 20
  Top Layer w0.2: U1.23 56.675,92.975 57,93.3 R1.1 57,95.075 58.496,96.571 69.608,96.571 70.054,96.125 U2.42
IMU_SDA: R2.1 U1.24 U2.43 | length 21.2
  Top Layer w0.2: v1(56,95.7) 56,95.5 56,93.45 R2.1 55.9,93.3 56.175,93.025 U1.24 ; v1(58.875,95.675) 59.264,96.064 69.425,96.064 69.862,95.627 69.862,95.625 U2.43
  Bottom Layer w0.2: v1(56,95.7) 56.025,95.675 56.6,95.675 v1(58.875,95.675)
LDO_EN: IC1.3 R12.1 | length 3.3
  Top Layer w0.2: IC1.3 67.906,107.458 68.023,107.575 68.175,107.575 68.375,107.775 R12.1
LED_PWR_NEG: D3.K R13.2 | length 1.6
  Top Layer w0.5: D3.K R13.2
MCU_BOOT0: R8.2 SW1.34 U2.44 | length 31.8
  Top Layer w0.2: v1(64.175,94.375) 65.357,95.557 69.294,95.557 69.726,95.125 U2.44
  Top Layer w0.25: SW1.34@59.925,113.075 59.925,108.925 59.938,108.913 59.938,107.538 60,107.475 v1(61.05,107.475) ; v1(65.6,105.575) 65.613,105.563 65.613,100.562 v1(65.625,100.55)
  Bottom Layer w0.25: v1(61.05,107.475) 64.425,107.475 65.6,106.3 v1(65.6,105.575) ; v1(64.175,94.375) 64.175,99.1 v1(65.625,100.55)
MCU_BUTTON1: BUTT1.12 C22.2 R10.1 U2.28 | length 55.4
  Top Layer w0.25: C22.2 74.537,73.287 75.888,73.287 75.925,73.325 80.075,73.325 80.275,73.325 81.775,71.825 81.775,71.675 81.95,71.5 R10.1 82.05,71.5 83.033,72.483 83.033,72.608 v2(83.1,72.675) ; v1(75.525,103.15) 75.525,100.3 75.675,100.15 U2.28
  Bottom Layer w0.25: v1(75.525,103.15) 83.2,103.15 86.15,100.2 86.15,74.35 84.475,72.675 v2(83.1,72.675)
MCU_BUTTON2: BUTT2.12 C23.2 R11.1 U2.27 | length 61.6
  Top Layer w0.25: C23.2 65.537,73.287 66.888,73.287 66.925,73.325 71.075,73.325 71.275,73.325 72.775,71.825 72.775,71.675 72.95,71.5 73,71.55 v2(73,73) ; U2.27 76.175,100.225 76.3,100.35 v1(76.3,102.6)
  Bottom Layer w0.25: v2@72.925,73.1 73.383,73.558 84.183,73.558 85.2,74.575 85.2,100.15 82.75,102.6 v1(76.3,102.6)
MCU_BUTTON3: BUTT3.12 C21.2 R9.1 U2.25 | length 67
  Top Layer w0.25: C21.2 56.537,73.287 57.887,73.287 57.925,73.325 62.075,73.325 62.275,73.325 63.775,71.825 63.775,71.675 63.95,71.5 R9.1 v2(64,73) ; U2.25 77.175,99.575 77.775,100.175 77.775,101.375 v1(77.275,101.875)
  Bottom Layer w0.25: v2@63.925,73.1 65.15,74.325 83.625,74.325 84.4,75.1 84.4,99.775 82.15,102.025 77.466,102.025 77.316,101.875 v1(77.275,101.875)
MCU_COSCIN: C5.2 U2.3 X1.2 | length 7.1
  Top Layer w0.25: X1.2 69.673,88.377 70.35,87.7 70.767,87.7 C5.2 72.675,89.608 U2.3
MCU_COSCOUT: R5.1 U2.4 | length 5.1
  Top Layer w0.2: R5.1 73.175,88.474 U2.4
MCU_HOSCIN: C9.2 U2.5 X2.1 | length 7.5
  Top Layer w0.2: U2.5 73.675,88.5 74.418,87.757 74.647,87.757 C9.2 74.998,87.337 75.926,87.084 X2.1
MCU_HOSCOUT: R7.1 U2.6 | length 4.7
  Top Layer w0.2: U2.6 74.175,91.857 74.156,91.837 74.156,89.344 74.703,88.797 75.307,88.797 R7.1
MCU_LED_NEG: D2.K R3.2 | length 1.5
  Top Layer w0.5: D2.K R3.2
MCU_LED_POS: D2.A U2.26 | length 49.1
  Top Layer w0.25: D2.A 69.037,76.287 69.037,75.087 v2(69.05,75.075) ; U2.26 76.675,100.089 76.996,100.41 76.996,100.846 v1(77.025,100.875)
  Bottom Layer w0.25: v2(69.05,75.075) 83.025,75.075 83.525,75.575 83.525,99.5 81.575,101.45 78.475,101.45 77.9,100.875 v1(77.025,100.875)
MCU_NRST: C17.2 SW2.12 U2.7 | length 71.3
  Top Layer w0.2: v2(57.075,107.375) 57.075,108.925 SW2.12@57.075,113.075 ; v1@63.994,105.569 65.05,106.625 66.35,106.625 66.775,106.2 v1(66.775,100.625) ; v1(65.375,87.45) 65.4,87.475 65.4,92.4 v1(65.425,92.425) ; v2@72.25,82.975 73.075,83.8 73.875,83.8 75.45,82.225 78.1,82.225 78.9,83.025 78.9,83.65 C17.2@80.552,85.302 ; U2.7 74.675,91.791 74.556,91.672 74.556,89.869 74.761,89.664 74.798,89.627 74.849,89.613 77.102,88.987 77.325,88.925 79.4,88.925 81.121,87.204 81.121,85.871 C17.2 80.55,85.379 C17.2@80.55,85.304
  Bottom Layer w0.2: v2(57.075,107.375) 57.025,107.325 57.025,106.05 58,105.075 60.65,105.075 61.15,105.575 v1(63.988,105.575) ; v1(65.375,87.45) 71.125,87.45 72.25,86.325 v2(72.25,82.925) ; v1(65.425,92.425) 65.425,99.275 v1(66.775,100.625)
MCU_UART_RX: U2.31 UART.3 | length 42.4
  Top Layer w0.25: UART.3 61.975,77.515 61.975,79 64.2,81.225 v2(64.2,84.3) ; U2.31 74.175,100.125 74.325,100.275 v1(74.325,101.7)
  Bottom Layer w0.25: UART.3@61.8,77.66 UART.3 ; v2(64.2,84.3) 64.2,90 60.875,93.325 60.875,100.275 62.925,102.325 68.575,102.325 69.2,101.7 v1(74.325,101.7)
MCU_UART_TX: U2.30 UART.2 | length 45.9
  Top Layer w0.25: UART.2 59.755,77.835 59.755,78.58 62.9,81.725 v2(62.9,84.3) ; v1(74.375,102.65) 74.9,102.125 74.9,100.2 74.675,99.975 U2.30
  Bottom Layer w0.25: v2(62.9,84.3) 62.9,90 59.825,93.075 59.825,101.175 61.775,103.125 69.95,103.125 70.775,102.3 71.917,102.3 72.267,102.65 v1(74.375,102.65)
MCU_VCAP1: C16.2 U2.22 | length 1.8
  Top Layer w0.2: U2.22 78.6,97.625
  Top Layer w0.5: 78.6,97.625 78.775,97.625 78.825,97.575
  Top Layer w0.8: 78.825,97.575 78.925,97.475 79.5,97.475 C16.2
NetJ3_A5: J3.A5 R4.1 | length 7
  Top Layer w0.25: J3.A5 77.45,108.073 77.45,109.75 78.025,110.325 R4.1
NetJ3_B5: J3.B5 R6.1 | length 11
  Top Layer w0.25: J3.B5 74.45,108.073 74.45,110.725 75.2,111.475 R6.1
PA0: PA.1 U2.10 | length 18
  Top Layer w0.25: U2.10 76.175,91.838 77.113,90.9 79.1,90.9 84.538,85.462 84.538,84.372 PA.1
PA1: PA.2 U2.11 | length 15.7
  Top Layer w0.25: U2.11 76.675,91.977 77.177,91.475 79.975,91.475 PA.2
PA2: PA.3 U2.12 | length 14
  Top Layer w0.25: U2.12 77.175,92.2 77.35,92.025 81.575,92.025 87.875,85.725 PA.3
PA3: PA.4 U2.13 | length 12.5
  Top Layer w0.25: U2.13 78.1,93.125 78.1,93.096 78.421,92.775 82.65,92.775 87.036,88.389 88.141,88.389 PA.4
PA4: PA.5 U2.14 | length 11.6
  Top Layer w0.25: U2.14 78.475,93.625 78.65,93.45 84.275,93.45 86.92,90.805 PA.5
PA5: PA.6 U2.15 | length 10.8
  Top Layer w0.25: U2.15 87.1,94.125 87.88,93.345 PA.6
PB0: PB.1 U2.18 | length 53.2
  Top Layer w0.25: U2.18 78.539,95.625 79.414,94.75 81.88,94.75 82.105,94.975 v2(82.2,94.975)
  Bottom Layer w0.25: PB.1 49.635,80.75 52.775,80.75 53.75,79.775 75.238,79.775 75.251,79.788 81.513,79.788 82.725,81 82.725,94.45 v2(82.2,94.975)
PB1: PB.2 U2.19 | length 51.5
  Top Layer w0.25: U2.19 78.675,96.125 79.35,95.45 81.03,95.45 81.18,95.6 v2(81.275,95.6)
  Bottom Layer w0.25: PB.2 52.915,83.185 55.35,80.75 80.875,80.75 81.737,81.612 81.737,93.713 81.275,94.175 v2(81.275,95.6)
PB2: PB.3 U2.20 | length 49.8
  Top Layer w0.25: U2.20 78.953,96.625 79.328,96.25 v2(80.275,96.25)
  Bottom Layer w0.25: PB.3 49.614,85.641 53.109,85.641 56.975,81.775 80.25,81.775 80.75,82.275 80.75,93.125 80.275,93.6 v2(80.275,96.25)
PB3: PB.4 U2.39 | length 30.6
  Top Layer w0.2: v1(55.4,99.05) 61.025,99.05 62.001,98.074 70.126,98.074 70.575,97.625 U2.39
  Bottom Layer w0.2: PB.4 51.49,88.265 54.95,91.725 54.95,95.95 55.4,96.4 v1(55.4,99.05)
PB4: PB.5 U2.40 | length 28
  Top Layer w0.2: v1(54.35,98.125) 59.375,98.125 59.914,97.586 69.966,97.586 70.427,97.125 U2.40
  Bottom Layer w0.2: PB.5 52.18,90.805 53.9,92.525 53.9,95.85 54.35,96.3 v1(54.35,98.125)
PB5: PB.6 U2.41 | length 24.9
  Top Layer w0.2: v1(53.425,97.1) 53.446,97.079 69.8,97.079 70.253,96.625 U2.41
  Bottom Layer w0.2: PB.6 52.47,93.345 53.15,94.025 53.15,96.35 53.4,96.6 53.4,97.075 v1(53.425,97.1)
SWCLK: SWD.3 U2.37 | length 42.4
  Top Layer w0.25: v1(62.725,99.1) 63.2,98.625 U2.37 ; SWD.3 78.58,79.805 79.7,80.925 v2(79.7,82.925)
  Bottom Layer w0.25: v1(62.725,99.1) 62.725,93.725 67.175,89.275 75.35,89.275 79.7,84.925 v2(79.7,82.925)
SWDIO: SWD.2 U2.34 | length 44.7
  Top Layer w0.25: v1(72.475,101.05) 72.475,101.009 72.675,100.809 U2.34 ; v2(73.525,82.925) 73.575,82.875 73.575,82.25 76.04,79.785 SWD.2
  Bottom Layer w0.25: v1(72.475,101.05) 71.5,101.05 70.825,100.375 68.125,100.375 66.975,101.525 63.75,101.525 61.9,99.675 61.9,93.425 66.95,88.375 71.65,88.375 73.525,86.5 v2(73.525,82.925)
USB_N: J3.A7 J3.B7 U2.32 | length 11.6
  Top Layer w0.28: U2.32 73.675,102.968 75.632,104.925 75.925,105.218 75.925,105.425 75.925,107.354 ; J3.A7 75.935,108.038 75.935,107.354 76.156,107.133 76.694,107.133 76.915,107.354 76.915,108.038 J3.B7
USB_P: J3.A6 J3.B6 U2.33 | length 12.3
  Top Layer w0.28: U2.33 73.175,103.175 75.425,105.425 75.425,107.354 J3.B6 75.435,108.058 75.435,108.741 75.656,108.963 76.194,108.963 76.415,108.741 76.415,108.058 J3.A6
VBUS: C6.2 D1.K FB1.1 J3.A4B9 J3.B4A9 | length 10.8
  Top Layer w0.6: v2(73.775,107) J3.B4A9 ; D1.K 78.55,106.45 78.575,106.475 J3.A4B9
  Top Layer w0.8: v2(77.1,106.4) D1.K
  Top Layer w1: D1.K 78.55,104.7 FB1.1 79.725,104.675 C6.2
  Bottom Layer w0.8: v2(73.775,107) 74.375,106.4 v2(77.1,106.4)
pads on no net: J3.A8 J3.B8 J3.MH U1.2 U1.3 U1.4 U1.5 U1.6 U1.7 U1.14 U1.15 U1.16 U1.17 U1.19 U1.21 U1.22 U2.2 U2.16 U2.17 U2.21 U2.29 U2.38 U2.46

## Polygon pours and split planes (outlines as drawn)
GND on Bottom Layer "GND_L02_P002" (solid, pour order 2): 51.5,114 ccw(c51.5,109) 46.5,109 46.5,74 ccw(c51.5,74) 51.5,69 86.5,69 ccw(c86.5,74) 91.5,74 91.5,109 ccw(c86.5,109) 86.5,114 81,114
GND on Top Layer "GND_L01_P003" (solid, pour order 3): 51.5,114 ccw(c51.5,109) 46.5,109 46.5,74 ccw(c51.5,74) 51.5,69 86.5,69 ccw(c86.5,74) 91.5,74 91.5,109 ccw(c86.5,109) 86.5,114 81,114

## Other copper
Bottom Layer:
  rectangle net GND: 71.403,92.825 77.4,98.813
  rectangle net GND: 71.725,93.175 77.125,98.575

## Silkscreen, mask and mechanical layers (free items; w line width, h text height)
Top Overlay:
  drawing of 85 lines, arcs and shapes, not listed
  text "GND" at 51.58,106.35 h0.5
  text "GND" at 84.882,106.35 h0.5
  text "+5" at 51.555,103.81 h0.5
  text "+5" at 85.407,103.81 h0.5
  text "+3.3" at 51.48,101.27 h0.5
  text "+3.3" at 84.566,101.27 h0.5
  text "GND" at 51.58,98.73 h0.5
  text "GND" at 84.882,98.73 h0.5
  text "5" at 85.597,93.005 h0.8
  text "5" at 51.582,92.91 h0.8
  text "4" at 85.567,90.31 h0.8
  text "4" at 51.552,90.215 h0.8
  text "3" at 85.567,87.77 h0.8
  text "3" at 51.552,87.675 h0.8
  text "2" at 85.567,85.23 h0.8
  text "2" at 51.552,85.135 h0.8
  text "1" at 85.683,82.65 h0.8
  text "1" at 51.668,82.555 h0.8
  text "0" at 85.567,80.15 h0.8
  text "0" at 51.552,80.055 h0.8
  text "+3.3" at 55.925,74.9 h0.5
  text "TX" at 58.983,74.9 h0.5
  text "RX" at 61.483,74.9 h0.5
  text "GND" at 63.934,74.9 h0.5
  text "+3.3" at 72.545,74.9 h0.5
  text "IO" at 75.645,74.9 h0.5
  text "CLK" at 77.854,74.9 h0.5
  text "GND" at 80.554,74.9 h0.5
Bottom Overlay:
  region: 741 vertices and 0 holes, not listed, extent 52.121,85.858 53.117,86.808
  text "Chong's / Cool / STM32 Board" at 71.744,87.5 h3
  text "Made With Love" at 64.343,85.93 h0.8
  text "15/12/24" at 84.5,80.5 h0.8

## Text inside footprints (layer, text, board x,y; h text height)
D2: Mechanical 13 "+" at 68.517,74.917 h0.5 r90
D3: Mechanical 13 "+" at 66.879,109.579 h0.5 r90